# EAGLE board real_with_onsemi (EAGLE 9.3.0)
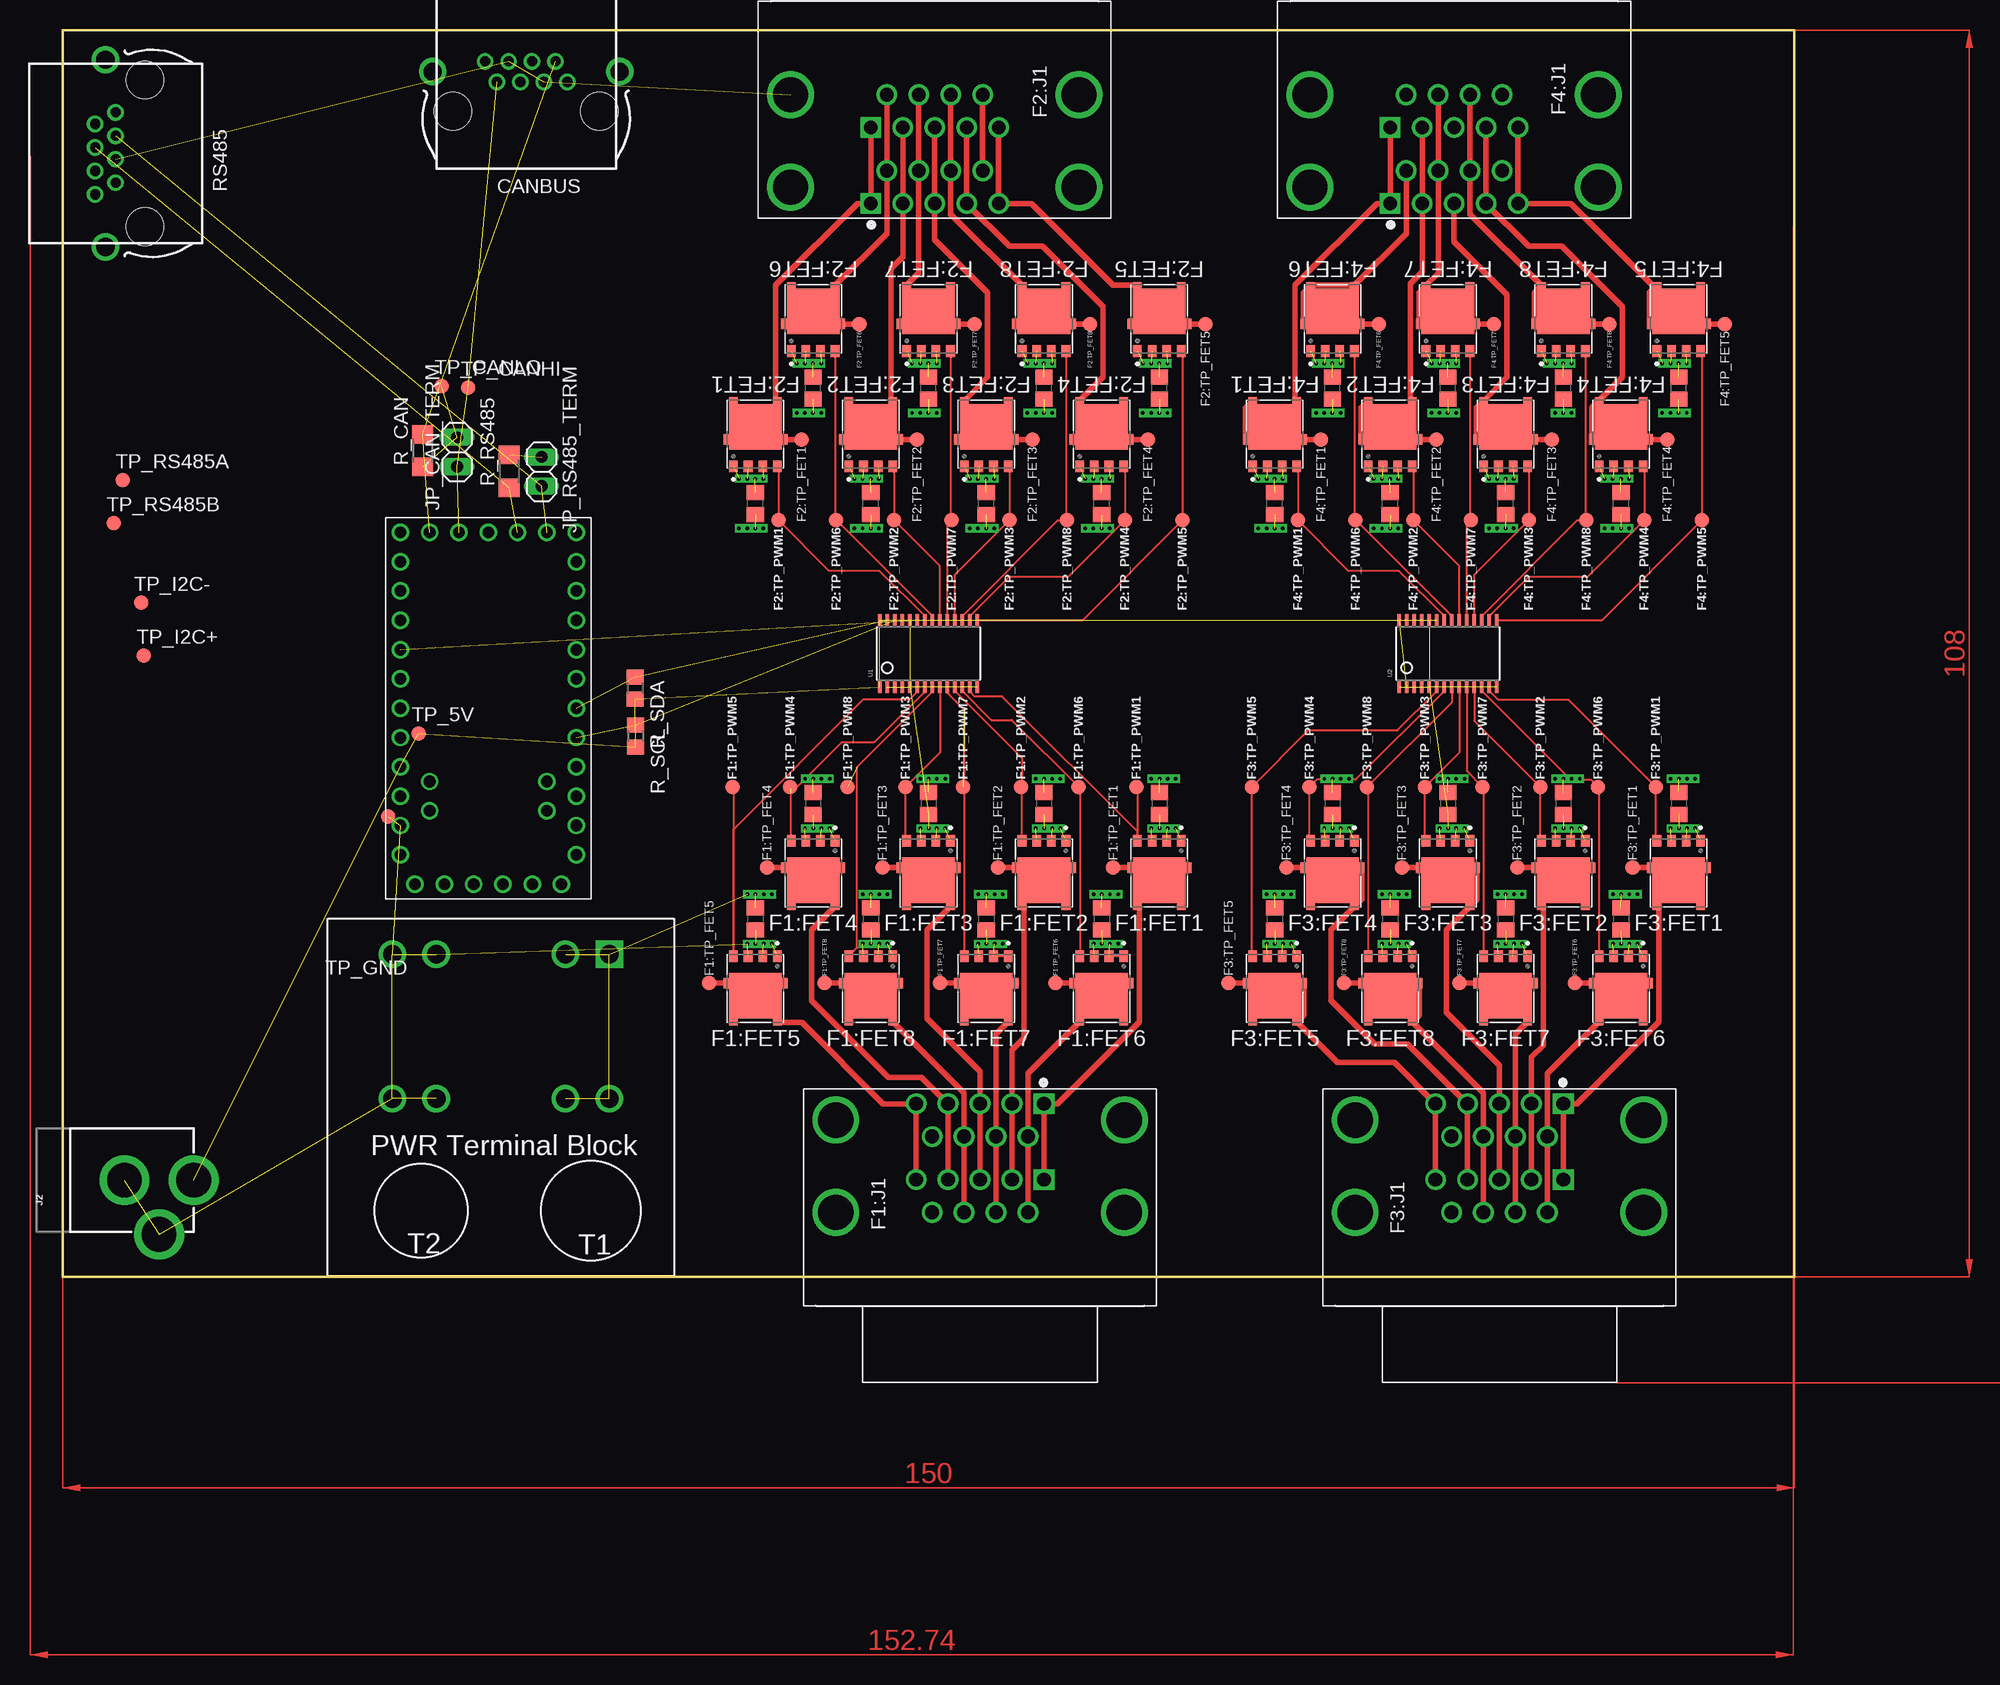
[diagram p0: board, top side]
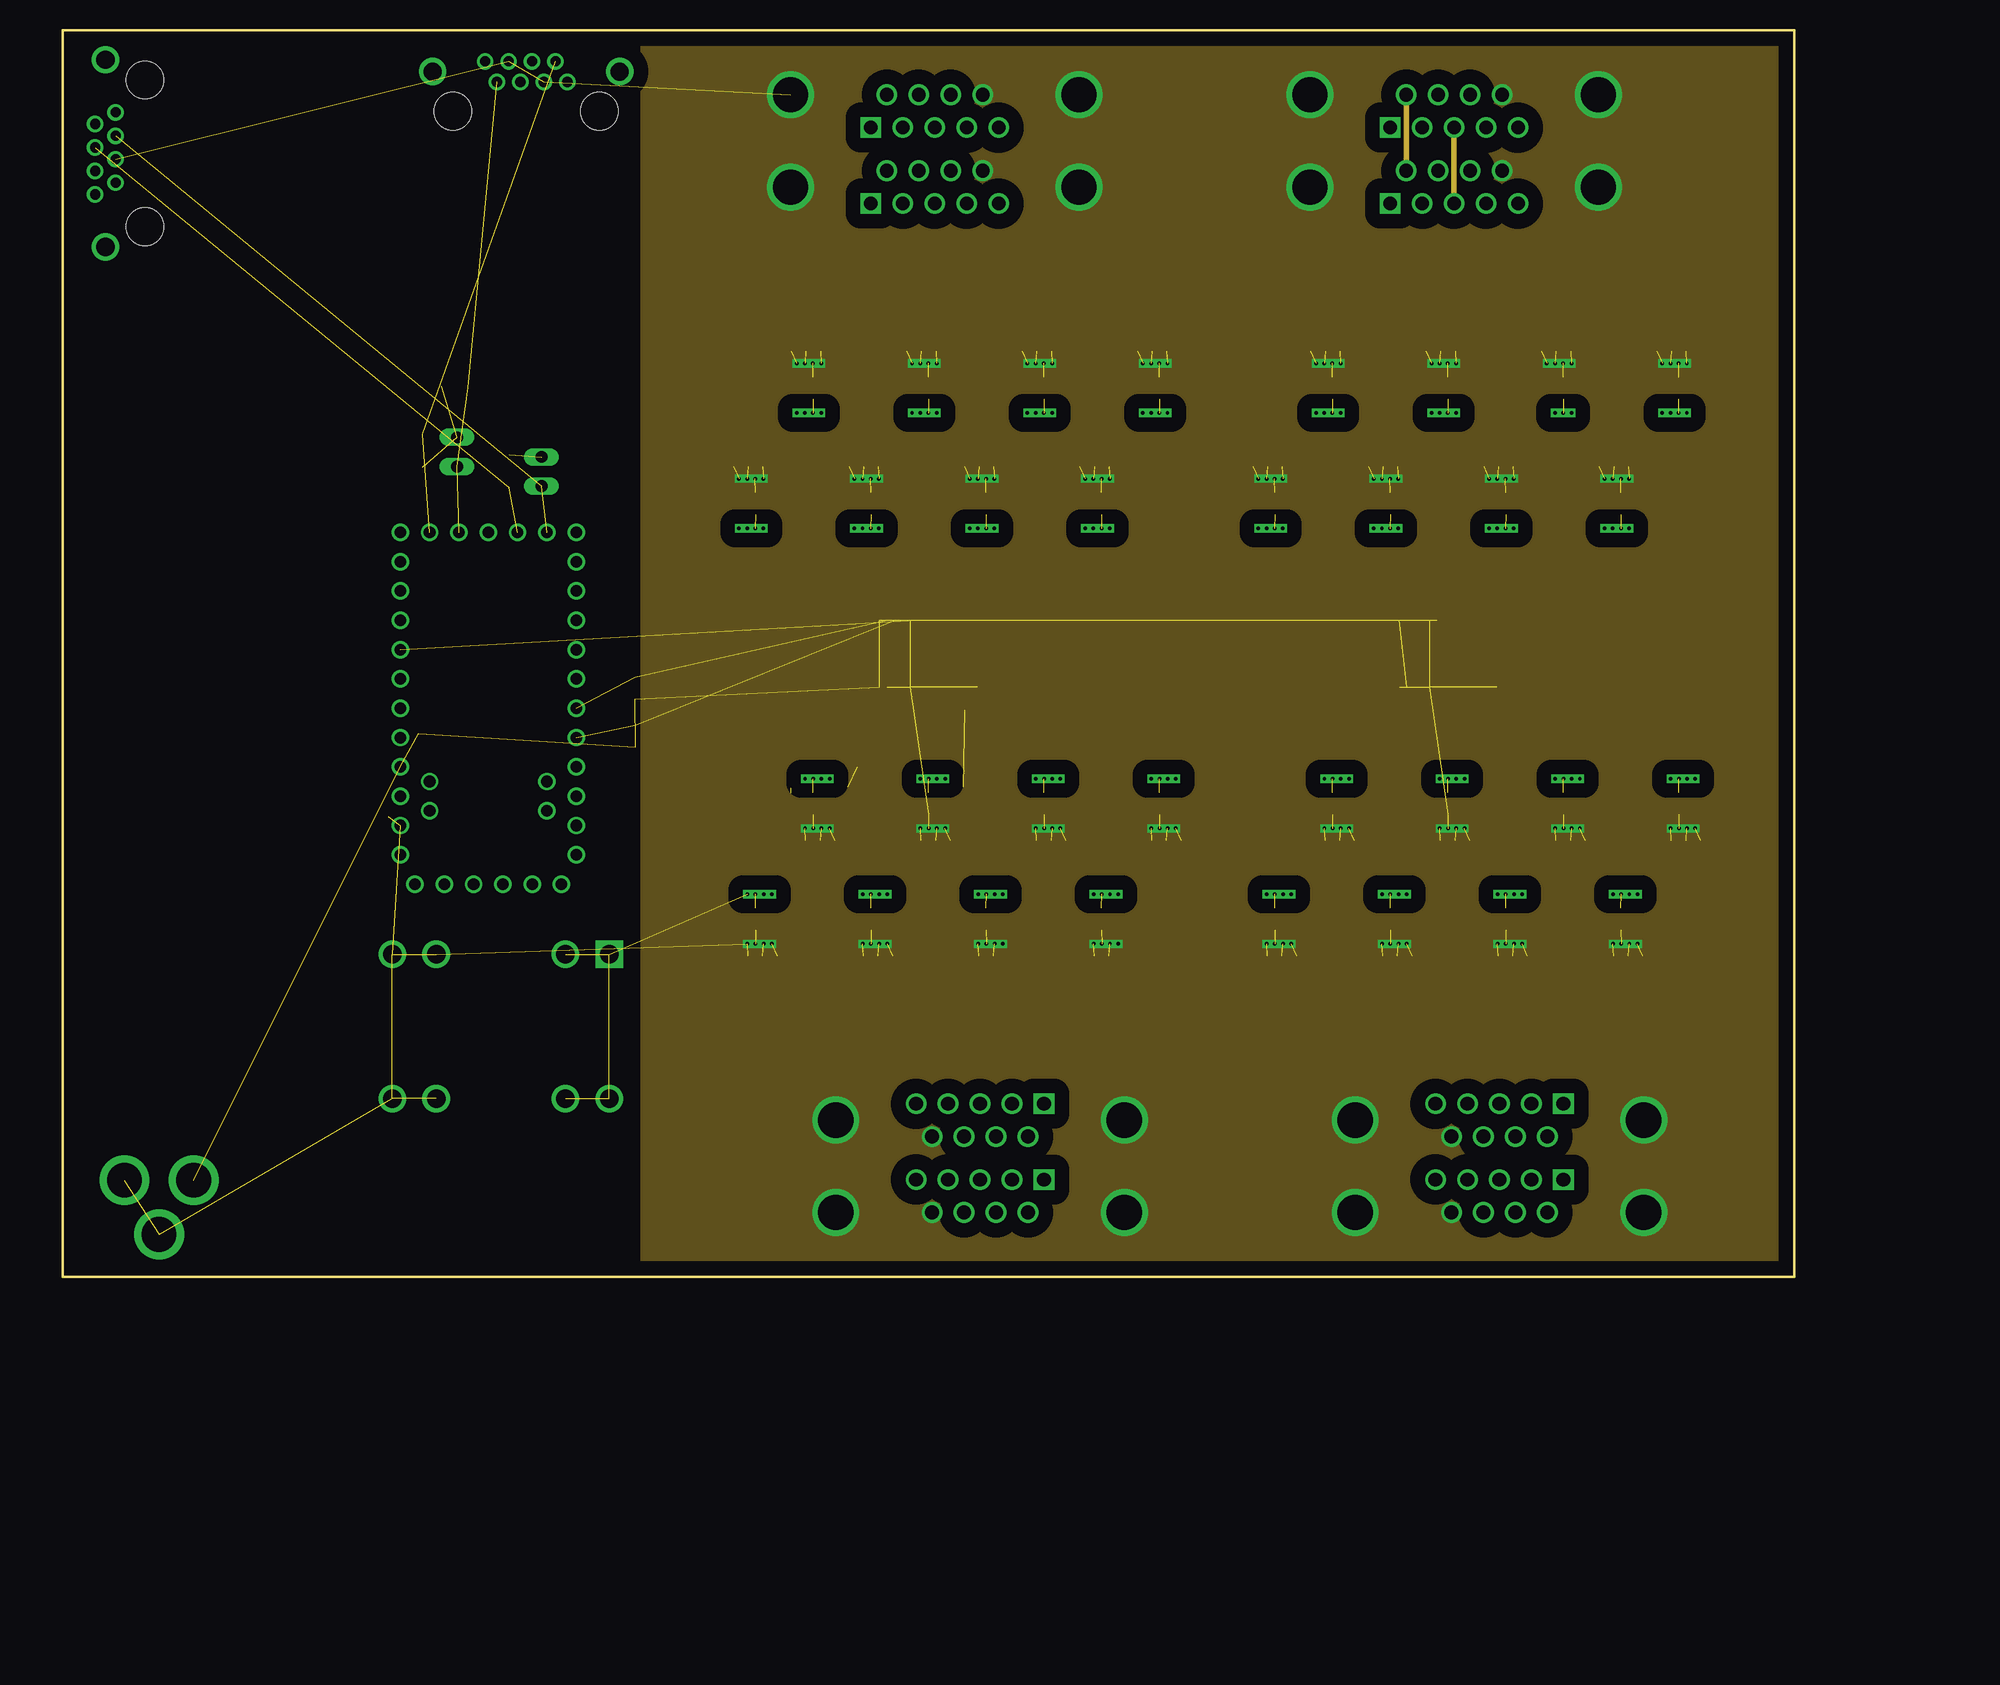
[diagram p1: board, inner layer Route2]
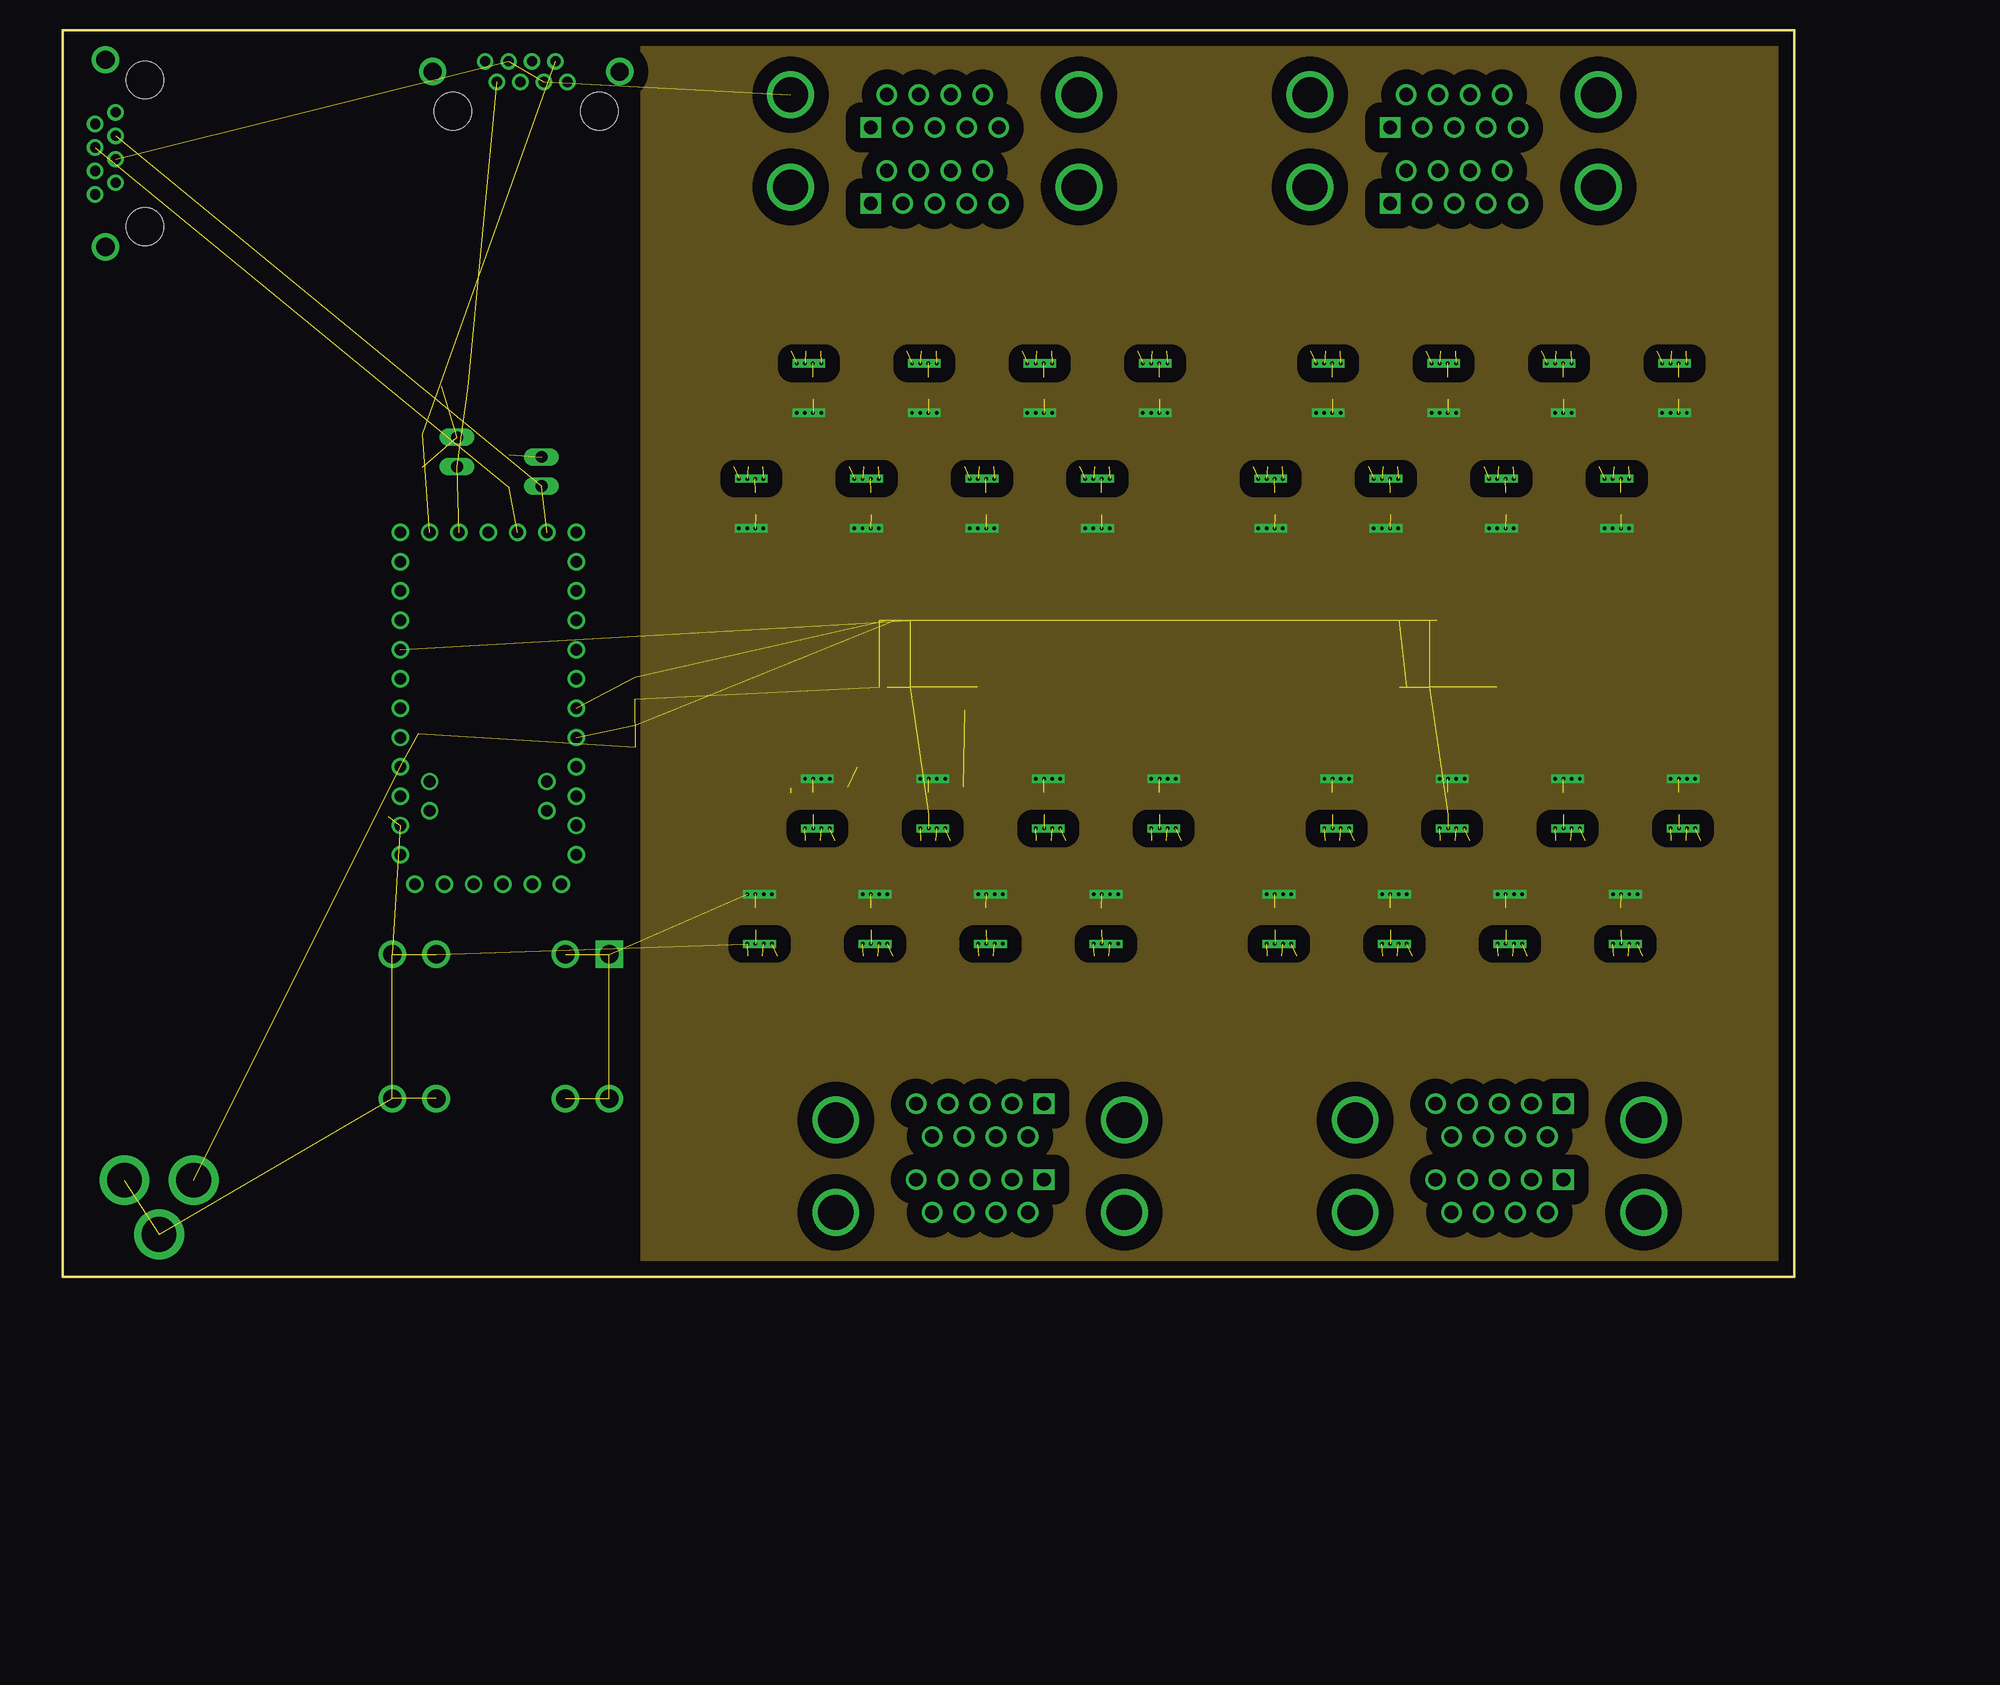
[diagram p2: board, inner layer Route15]

Size 150 x 108 mm. Coordinates in mm from the lower left corner, seen from the top.
Outline: 0,0 150,0 150,108 0,108 0,0
Copper layers (1+2*15+16): Top 0.035mm / dielectric 1.5mm / Route2 0.035mm / dielectric 0.15mm / Route15 0.035mm / dielectric 0.2mm / Bottom 0.035mm
Design rules "default *": minimum track width 6mil, minimum drill 0.35mm, track to track 6mil, track to pad 6mil, pad to pad 6mil, via to via 6mil, smd to smd 6mil, copper to edge 40mil, drill to drill 6mil, minimum pad ring 10mil, minimum via ring 8mil, stop-mask expansion 4mil, vias tented up to drill 0mil, thermal gap 10mil
Net classes: 1 heater: width 0.457 mm, clearance 0.254 mm; 10 heaters: width 0.457 mm, clearance 0.254 mm

## Footprints (pad centres in the part's own frame; a part is rotated, then mirrored left to right if it is on the bottom)
0446200002 = drill 0.889 pad 1.422: 1 3.556,2.54; 2 2.54,4.318; 3 1.524,2.54; 4 0.508,4.318; 5 -0.508,2.54; 6 -1.524,4.318; 7 -2.54,2.54; 8 -3.556,4.318 | drill 1.575 pad 2.286: S@1 -8.103,3.429; S@2 8.103,3.429 | hole 3.251: 6.35,0; -6.35,0
C0805 = smd 1.3 x 1.5: 1 -0.95,0; 2 0.95,0
DFN500X600X110-5N = smd 0.75 x 1: 1 -1.905,-2.795; 2 -0.635,-2.795; 3 0.635,-2.795; 4 1.905,-2.795 | smd 4.56 x 3.955: 5@1 0,0.647 | smd 0.495 x 0.905: 5@2 -2.527,-0.453; 5@3 2.527,-0.453 | smd 0.75 x 0.575: 5@4 1.905,2.913; 5@5 -1.905,2.913
NORCOMP_189-009-513R571 = drill 1.194 square: A1 0,0; B1 0,-6.579 | drill 1.194: A2 -2.769,0; A3 -5.537,0; A4 -8.306,0; A5 -11.074,0; A6 -1.384,-2.845; A7 -4.153,-2.845; A8 -6.921,-2.845; A9 -9.69,-2.845; B2 -2.769,-6.579; B3 -5.537,-6.579; B4 -8.306,-6.579; B5 -11.074,-6.579; B6 -1.384,-9.423; B7 -4.153,-9.423; B8 -6.921,-9.423; B9 -9.69,-9.423 | drill 3.048: SH1 6.96,-1.422; SH2 -18.034,-1.422; SH3 6.96,-9.423; SH4 -18.034,-9.423
B1,27 = smd 1.27 x 1.27: TP 0,0
POWER_JACK_PTH = drill 2.997 pad 4.318: GND 0,7.7; GNDBREAK 4.7,10.7; PWR 0,13.7
TERMINAL_BLOCK_PHOENIX = drill 1.6 square: P$1 9.4,12.4 | drill 1.6: P$2 5.6,12.4; P$3 -5.6,12.4; P$4 -9.4,12.4; P$5 9.4,-0.1; P$6 5.6,-0.1; P$7 -5.6,-0.1; P$8 -9.4,-0.1
1X02 = drill 1.016 long: 1 -1.27,0; 2 1.27,0
R1206 = smd 1.6 x 1.803: 1 -1.422,0; 2 1.422,0
R0805 = smd 1.3 x 1.5: 1 -0.95,0; 2 0.95,0
TSSOP28 = smd 0.305 x 0.991: 1 -4.225,-2.918; 2 -3.575,-2.918; 3 -2.925,-2.918; 4 -2.275,-2.918; 5 -1.625,-2.918; 6 -0.975,-2.918; 7 -0.325,-2.918; 8 0.325,-2.918; 9 0.975,-2.918; 10 1.625,-2.918; 11 2.275,-2.918; 12 2.925,-2.918; 13 3.575,-2.918; 14 4.225,-2.918; 15 4.225,2.918; 16 3.575,2.918; 17 2.925,2.918; 18 2.275,2.918; 19 1.625,2.918; 20 0.975,2.918; 21 0.325,2.918; 22 -0.325,2.918; 23 -0.975,2.918; 24 -1.625,2.918; 25 -2.275,2.918; 26 -2.925,2.918; 27 -3.575,2.918; 28 -4.225,2.918
CAN485 = drill 1: 2 -7.62,2.54; 3 -7.62,0; 4 -7.62,-2.54; 5 -7.62,-5.08; 6 -7.62,-7.62; 7 -7.62,-10.16; 8 -7.62,-12.7; 9 -7.62,-15.24; 10 7.62,-15.24; 11 7.62,-12.7; 12 7.62,-10.16; 13 7.62,-7.62; 485A -2.54,-15.24; 485B -5.08,-15.24; A0 7.62,-5.08; A1 7.62,-2.54; A2 7.62,0; A3 7.62,2.54; A4 5.08,6.35; A5 5.08,8.89; A6 -5.08,6.35; A7 -5.08,8.89; CANHI 2.54,-15.24; CANLO 5.08,-15.24; CTS -3.81,15.24; DTR 6.35,15.24; GND1 -7.62,5.08; GND2 7.62,10.16; GND3 0,-15.24; GND4 -6.35,15.24; RAW 7.62,12.7; RST 7.62,7.62; RST1 -7.62,7.62; RXI 1.27,15.24; RXI1 -7.62,10.16; TXO 3.81,15.24; TXO1 -7.62,12.7; VCC 7.62,5.08; VCC1 -1.27,15.24

## Placement (x,y rotation side)
CANBUS  RJ45-0446200002  [0446200002]  40.14,101 0 top
F1:C1  [C0805]  95,41 270 top
F1:C2  [C0805]  85,41 270 top
F1:C3  [C0805]  75,41 270 top
F1:C4  [C0805]  65,41 270 top
F1:C5  [C0805]  60,31 270 top
F1:C6  [C0805]  90,31 270 top
F1:C7  [C0805]  80,31 270 top
F1:C8  [C0805]  70,31 270 top
F1:FET1  ONSEMI_FET_NVMFS5C604NL  [DFN500X600X110-5N]  95,35 180 top
F1:FET2  ONSEMI_FET_NVMFS5C604NL  [DFN500X600X110-5N]  85,35 180 top
F1:FET3  ONSEMI_FET_NVMFS5C604NL  [DFN500X600X110-5N]  75,35 180 top
F1:FET4  ONSEMI_FET_NVMFS5C604NL  [DFN500X600X110-5N]  65,35 180 top
F1:FET5  ONSEMI_FET_NVMFS5C604NL  [DFN500X600X110-5N]  60,25 180 top
F1:FET6  ONSEMI_FET_NVMFS5C604NL  [DFN500X600X110-5N]  90,25 180 top
F1:FET7  ONSEMI_FET_NVMFS5C604NL  [DFN500X600X110-5N]  80,25 180 top
F1:FET8  ONSEMI_FET_NVMFS5C604NL  [DFN500X600X110-5N]  70,25 180 top
F1:J1  NORCOMP_189-009-513R571  [NORCOMP_189-009-513R571]  85,15 0 top
F1:TP_FET1  TPB1,27  [B1,27]  91,35.45 0 top
F1:TP_FET2  TPB1,27  [B1,27]  81,35.45 0 top
F1:TP_FET3  TPB1,27  [B1,27]  71,35.45 0 top
F1:TP_FET4  TPB1,27  [B1,27]  61,35.45 0 top
F1:TP_FET5  TPB1,27  [B1,27]  56,25.45 0 top
F1:TP_FET6  TPB1,27  [B1,27]  86,25.45 0 top
F1:TP_FET7  TPB1,27  [B1,27]  76,25.45 0 top
F1:TP_FET8  TPB1,27  [B1,27]  66,25.45 0 top
F1:TP_PWM1  TPB1,27  [B1,27]  93,42.45 0 top
F1:TP_PWM2  TPB1,27  [B1,27]  83,42.45 0 top
F1:TP_PWM3  TPB1,27  [B1,27]  73,42.45 0 top
F1:TP_PWM4  TPB1,27  [B1,27]  63,42.45 0 top
F1:TP_PWM5  TPB1,27  [B1,27]  58,42.45 0 top
F1:TP_PWM6  TPB1,27  [B1,27]  88,42.45 0 top
F1:TP_PWM7  TPB1,27  [B1,27]  78,42.45 0 top
F1:TP_PWM8  TPB1,27  [B1,27]  68,42.45 0 top
F2:C1  [C0805]  60,67 90 top
F2:C2  [C0805]  70,67 90 top
F2:C3  [C0805]  80,67 90 top
F2:C4  [C0805]  90,67 90 top
F2:C5  [C0805]  95,77 90 top
F2:C6  [C0805]  65,77 90 top
F2:C7  [C0805]  75,77 90 top
F2:C8  [C0805]  85,77 90 top
F2:FET1  ONSEMI_FET_NVMFS5C604NL  [DFN500X600X110-5N]  60,73 0 top
F2:FET2  ONSEMI_FET_NVMFS5C604NL  [DFN500X600X110-5N]  70,73 0 top
F2:FET3  ONSEMI_FET_NVMFS5C604NL  [DFN500X600X110-5N]  80,73 0 top
F2:FET4  ONSEMI_FET_NVMFS5C604NL  [DFN500X600X110-5N]  90,73 0 top
F2:FET5  ONSEMI_FET_NVMFS5C604NL  [DFN500X600X110-5N]  95,83 0 top
F2:FET6  ONSEMI_FET_NVMFS5C604NL  [DFN500X600X110-5N]  65,83 0 top
F2:FET7  ONSEMI_FET_NVMFS5C604NL  [DFN500X600X110-5N]  75,83 0 top
F2:FET8  ONSEMI_FET_NVMFS5C604NL  [DFN500X600X110-5N]  85,83 0 top
F2:J1  NORCOMP_189-009-513R571  [NORCOMP_189-009-513R571]  70,93 180 top
F2:TP_FET1  TPB1,27  [B1,27]  64,72.55 0 top
F2:TP_FET2  TPB1,27  [B1,27]  74,72.55 0 top
F2:TP_FET3  TPB1,27  [B1,27]  84,72.55 0 top
F2:TP_FET4  TPB1,27  [B1,27]  94,72.55 0 top
F2:TP_FET5  TPB1,27  [B1,27]  99,82.55 0 top
F2:TP_FET6  TPB1,27  [B1,27]  69,82.55 0 top
F2:TP_FET7  TPB1,27  [B1,27]  79,82.55 0 top
F2:TP_FET8  TPB1,27  [B1,27]  89,82.55 0 top
F2:TP_PWM1  TPB1,27  [B1,27]  62,65.55 0 top
F2:TP_PWM2  TPB1,27  [B1,27]  72,65.55 0 top
F2:TP_PWM3  TPB1,27  [B1,27]  82,65.55 0 top
F2:TP_PWM4  TPB1,27  [B1,27]  92,65.55 0 top
F2:TP_PWM5  TPB1,27  [B1,27]  97,65.55 0 top
F2:TP_PWM6  TPB1,27  [B1,27]  67,65.55 0 top
F2:TP_PWM7  TPB1,27  [B1,27]  77,65.55 0 top
F2:TP_PWM8  TPB1,27  [B1,27]  87,65.55 0 top
F3:C1  [C0805]  140,41 270 top
F3:C2  [C0805]  130,41 270 top
F3:C3  [C0805]  120,41 270 top
F3:C4  [C0805]  110,41 270 top
F3:C5  [C0805]  105,31 270 top
F3:C6  [C0805]  135,31 270 top
F3:C7  [C0805]  125,31 270 top
F3:C8  [C0805]  115,31 270 top
F3:FET1  ONSEMI_FET_NVMFS5C604NL  [DFN500X600X110-5N]  140,35 180 top
F3:FET2  ONSEMI_FET_NVMFS5C604NL  [DFN500X600X110-5N]  130,35 180 top
F3:FET3  ONSEMI_FET_NVMFS5C604NL  [DFN500X600X110-5N]  120,35 180 top
F3:FET4  ONSEMI_FET_NVMFS5C604NL  [DFN500X600X110-5N]  110,35 180 top
F3:FET5  ONSEMI_FET_NVMFS5C604NL  [DFN500X600X110-5N]  105,25 180 top
F3:FET6  ONSEMI_FET_NVMFS5C604NL  [DFN500X600X110-5N]  135,25 180 top
F3:FET7  ONSEMI_FET_NVMFS5C604NL  [DFN500X600X110-5N]  125,25 180 top
F3:FET8  ONSEMI_FET_NVMFS5C604NL  [DFN500X600X110-5N]  115,25 180 top
F3:J1  NORCOMP_189-009-513R571  [NORCOMP_189-009-513R571]  130,15 0 top
F3:TP_FET1  TPB1,27  [B1,27]  136,35.45 0 top
F3:TP_FET2  TPB1,27  [B1,27]  126,35.45 0 top
F3:TP_FET3  TPB1,27  [B1,27]  116,35.45 0 top
F3:TP_FET4  TPB1,27  [B1,27]  106,35.45 0 top
F3:TP_FET5  TPB1,27  [B1,27]  101,25.45 0 top
F3:TP_FET6  TPB1,27  [B1,27]  131,25.45 0 top
F3:TP_FET7  TPB1,27  [B1,27]  121,25.45 0 top
F3:TP_FET8  TPB1,27  [B1,27]  111,25.45 0 top
F3:TP_PWM1  TPB1,27  [B1,27]  138,42.45 0 top
F3:TP_PWM2  TPB1,27  [B1,27]  128,42.45 0 top
F3:TP_PWM3  TPB1,27  [B1,27]  118,42.45 0 top
F3:TP_PWM4  TPB1,27  [B1,27]  108,42.45 0 top
F3:TP_PWM5  TPB1,27  [B1,27]  103,42.45 0 top
F3:TP_PWM6  TPB1,27  [B1,27]  133,42.45 0 top
F3:TP_PWM7  TPB1,27  [B1,27]  123,42.45 0 top
F3:TP_PWM8  TPB1,27  [B1,27]  113,42.45 0 top
F4:C1  [C0805]  105,67 90 top
F4:C2  [C0805]  115,67 90 top
F4:C3  [C0805]  125,67 90 top
F4:C4  [C0805]  135,67 90 top
F4:C5  [C0805]  140,77 90 top
F4:C6  [C0805]  110,77 90 top
F4:C7  [C0805]  120,77 90 top
F4:C8  [C0805]  130,77 90 top
F4:FET1  ONSEMI_FET_NVMFS5C604NL  [DFN500X600X110-5N]  105,73 0 top
F4:FET2  ONSEMI_FET_NVMFS5C604NL  [DFN500X600X110-5N]  115,73 0 top
F4:FET3  ONSEMI_FET_NVMFS5C604NL  [DFN500X600X110-5N]  125,73 0 top
F4:FET4  ONSEMI_FET_NVMFS5C604NL  [DFN500X600X110-5N]  135,73 0 top
F4:FET5  ONSEMI_FET_NVMFS5C604NL  [DFN500X600X110-5N]  140,83 0 top
F4:FET6  ONSEMI_FET_NVMFS5C604NL  [DFN500X600X110-5N]  110,83 0 top
F4:FET7  ONSEMI_FET_NVMFS5C604NL  [DFN500X600X110-5N]  120,83 0 top
F4:FET8  ONSEMI_FET_NVMFS5C604NL  [DFN500X600X110-5N]  130,83 0 top
F4:J1  NORCOMP_189-009-513R571  [NORCOMP_189-009-513R571]  115,93 180 top
F4:TP_FET1  TPB1,27  [B1,27]  109,72.55 0 top
F4:TP_FET2  TPB1,27  [B1,27]  119,72.55 0 top
F4:TP_FET3  TPB1,27  [B1,27]  129,72.55 0 top
F4:TP_FET4  TPB1,27  [B1,27]  139,72.55 0 top
F4:TP_FET5  TPB1,27  [B1,27]  144,82.55 0 top
F4:TP_FET6  TPB1,27  [B1,27]  114,82.55 0 top
F4:TP_FET7  TPB1,27  [B1,27]  124,82.55 0 top
F4:TP_FET8  TPB1,27  [B1,27]  134,82.55 0 top
F4:TP_PWM1  TPB1,27  [B1,27]  107,65.55 0 top
F4:TP_PWM2  TPB1,27  [B1,27]  117,65.55 0 top
F4:TP_PWM3  TPB1,27  [B1,27]  127,65.55 0 top
F4:TP_PWM4  TPB1,27  [B1,27]  137,65.55 0 top
F4:TP_PWM5  TPB1,27  [B1,27]  142,65.55 0 top
F4:TP_PWM6  TPB1,27  [B1,27]  112,65.55 0 top
F4:TP_PWM7  TPB1,27  [B1,27]  122,65.55 0 top
F4:TP_PWM8  TPB1,27  [B1,27]  132,65.55 0 top
J2  POWER_JACK  [POWER_JACK_PTH]  -2.37,8.37 270 top
J_48V  PHOENIX_TERMINAL_BLOCK  [TERMINAL_BLOCK_PHOENIX]  37.94,15.54 0 top
JP_CAN_TERM  [1X02]  34.15,71.47 90 top
JP_RS485_TERM  [1X02]  41.47,69.77 90 top
R_CAN  120  [R1206]  31.18,71.59 90 top
R_RS485  120  [R1206]  38.67,69.8 90 top
R_SCL  4.7k  [R0805]  49.62,46.85 270 top
R_SDA  4.7k  [R0805]  49.57,51.01 270 top
RS485  RJ45-0446200002  [0446200002]  7.11,97.34 90 top
TP_5V  TPB1,27  [B1,27]  30.83,47.09 0 top
TP_CANHI  TPB1,27  [B1,27]  35.09,77.04 0 top
TP_CANLO  TPB1,27  [B1,27]  32.82,77.19 0 top
TP_GND  TPB1,27  [B1,27]  28.19,39.9 0 top
TP_I2C+  TPB1,27  [B1,27]  7,53.82 0 top
TP_I2C-  TPB1,27  [B1,27]  6.78,58.4 0 top
TP_RS485A  TPB1,27  [B1,27]  5.18,69.03 0 top
TP_RS485B  TPB1,27  [B1,27]  4.4,65.3 0 top
U1  [TSSOP28]  75,54 0 top
U2  [TSSOP28]  120,54 0 top
U$1  CAN485FULL_SOCKET  [CAN485]  36.85,49.26 180 top

## Library data of the parts
CANBUS RS485 = real_library; MF: MOLEX; MPN: 0446200002; OC_FARNELL: 9251910
F1:C1-F1:C8 F2:C1-F2:C8 F3:C1-F3:C8 F4:C1-F4:C8 = rcl; SPICEPREFIX: C
F1:FET1 = real_library; BGA: (LAYERS (-16 HEATER_A0))
F1:FET2 = real_library; BGA: (LAYERS (-16 HEATER_A1))
F1:FET3 = real_library; BGA: (LAYERS (-16 HEATER_A2))
F1:FET4 = real_library; BGA: (LAYERS (-16 HEATER_A3))
F1:FET5 = real_library; BGA: (LAYERS (-16 HEATER_A4))
F1:FET6 = real_library; BGA: (LAYERS (-16 HEATER_A5))
F1:FET7 = real_library; BGA: (LAYERS (-16 HEATER_A6))
F1:FET8 = real_library; BGA: (LAYERS (-16 HEATER_A7))
F1:J1 F2:J1 F3:J1 F4:J1 = real_library; AVAILABILITY: Unavailable; DESCRIPTION: Conn D-Subminiature F/F 9/9 POS 2.77mm Solder RA Thru-Hole 18 Terminal 2 Port; MF: NorComp Inc.; MP: 189-009-513R571; PACKAGE: None; PRICE: None
F1:TP_FET1-F1:TP_FET8 F1:TP_PWM1-F1:TP_PWM8 F2:TP_FET1-F2:TP_FET8 F2:TP_PWM1-F2:TP_PWM8 F3:TP_FET1-F3:TP_FET8 F3:TP_PWM1-F3:TP_PWM8 F4:TP_FET1-F4:TP_FET8 F4:TP_PWM1-F4:TP_PWM8 TP_5V TP_CANHI TP_CANLO TP_GND TP_I2C+ TP_I2C- TP_RS485A TP_RS485B = testpad
F2:FET1-F2:FET8 F3:FET1-F3:FET8 F4:FET1-F4:FET8 J_48V U1 U2 U$1 = real_library
J2 = real_library; PROD_ID: CONN-08197
JP_CAN_TERM JP_RS485_TERM = pinhead
R_CAN R_RS485 R_SCL R_SDA = rcl; SPICEPREFIX: R

## Nets
ENABLE: U1.23 U2.23 U$1.A0
GND: CANBUS.3 CANBUS.6 F1:C1.2 F1:C2.2 F1:C3.2 F1:C4.2 F1:C5.2 F1:C6.2 F1:C7.2 F1:C8.2 F1:FET1.1 F1:FET1.2 F1:FET1.3 F1:FET2.1 F1:FET2.2 F1:FET2.3 F1:FET3.1 F1:FET3.2 F1:FET3.3 F1:FET4.1 F1:FET4.2 F1:FET4.3 F1:FET5.1 F1:FET5.2 F1:FET5.3 F1:FET6.1 F1:FET6.2 F1:FET6.3 F1:FET7.1 F1:FET7.2 F1:FET7.3 F1:FET8.1 F1:FET8.2 F1:FET8.3 F1:J1.A9 F1:J1.B9 F1:J1.SH1 F1:J1.SH2 F1:J1.SH3 F1:J1.SH4 F2:C1.2 F2:C2.2 F2:C3.2 F2:C4.2 F2:C5.2 F2:C6.2 F2:C7.2 F2:C8.2 F2:FET1.1 F2:FET1.2 F2:FET1.3 F2:FET2.1 F2:FET2.2 F2:FET2.3 F2:FET3.1 F2:FET3.2 F2:FET3.3 F2:FET4.1 F2:FET4.2 F2:FET4.3 F2:FET5.1 F2:FET5.2 F2:FET5.3 F2:FET6.1 F2:FET6.2 F2:FET6.3 F2:FET7.1 F2:FET7.2 F2:FET7.3 F2:FET8.1 F2:FET8.2 F2:FET8.3 F2:J1.A9 F2:J1.B9 F2:J1.SH1 F2:J1.SH2 F2:J1.SH3 F2:J1.SH4 F3:C1.2 F3:C2.2 F3:C3.2 F3:C4.2 F3:C5.2 F3:C6.2 F3:C7.2 F3:C8.2 F3:FET1.1 F3:FET1.2 F3:FET1.3 F3:FET2.1 F3:FET2.2 F3:FET2.3 F3:FET3.1 F3:FET3.2 F3:FET3.3 F3:FET4.1 F3:FET4.2 F3:FET4.3 F3:FET5.1 F3:FET5.2 F3:FET5.3 F3:FET6.1 F3:FET6.2 F3:FET6.3 F3:FET7.1 F3:FET7.2 F3:FET7.3 F3:FET8.1 F3:FET8.2 F3:FET8.3 F3:J1.A9 F3:J1.B9 F3:J1.SH1 F3:J1.SH2 F3:J1.SH3 F3:J1.SH4 F4:C1.2 F4:C2.2 F4:C3.2 F4:C4.2 F4:C5.2 F4:C6.2 F4:C7.2 F4:C8.2 F4:FET1.1 F4:FET1.2 F4:FET1.3 F4:FET2.1 F4:FET2.2 F4:FET2.3 F4:FET3.1 F4:FET3.2 F4:FET3.3 F4:FET4.1 F4:FET4.2 F4:FET4.3 F4:FET5.1 F4:FET5.2 F4:FET5.3 F4:FET6.1 F4:FET6.2 F4:FET6.3 F4:FET7.1 F4:FET7.2 F4:FET7.3 F4:FET8.1 F4:FET8.2 F4:FET8.3 F4:J1.A9 F4:J1.B9 F4:J1.SH1 F4:J1.SH2 F4:J1.SH3 F4:J1.SH4 J2.GND J2.GNDBREAK J_48V.P$3 J_48V.P$4 J_48V.P$7 J_48V.P$8 RS485.5 TP_GND.TP U1.2 U1.3 U1.4 U1.5 U1.14 U1.24 U1.25 U2.1 U2.3 U2.4 U2.5 U2.14 U2.24 U2.25 U$1.GND2
HEATER_A0 [heaters]: F1:FET1.5@1 F1:FET1.5@2 F1:FET1.5@3 F1:FET1.5@4 F1:FET1.5@5 F1:J1.A1 F1:J1.B1 F1:TP_FET1.TP
HEATER_A1 [heaters]: F1:FET2.5@1 F1:FET2.5@2 F1:FET2.5@3 F1:FET2.5@4 F1:FET2.5@5 F1:J1.A2 F1:J1.B2 F1:TP_FET2.TP
HEATER_A2 [heaters]: F1:FET3.5@1 F1:FET3.5@2 F1:FET3.5@3 F1:FET3.5@4 F1:FET3.5@5 F1:J1.A3 F1:J1.B3 F1:TP_FET3.TP
HEATER_A3 [heaters]: F1:FET4.5@1 F1:FET4.5@2 F1:FET4.5@3 F1:FET4.5@4 F1:FET4.5@5 F1:J1.A4 F1:J1.B4 F1:TP_FET4.TP
HEATER_A4 [heaters]: F1:FET5.5@1 F1:FET5.5@2 F1:FET5.5@3 F1:FET5.5@4 F1:FET5.5@5 F1:J1.A5 F1:J1.B5 F1:TP_FET5.TP
HEATER_A5 [heaters]: F1:FET6.5@1 F1:FET6.5@2 F1:FET6.5@3 F1:FET6.5@4 F1:FET6.5@5 F1:J1.A6 F1:J1.B6 F1:TP_FET6.TP
HEATER_A6 [heaters]: F1:FET7.5@1 F1:FET7.5@2 F1:FET7.5@3 F1:FET7.5@4 F1:FET7.5@5 F1:J1.A7 F1:J1.B7 F1:TP_FET7.TP
HEATER_A7 [heaters]: F1:FET8.5@1 F1:FET8.5@2 F1:FET8.5@3 F1:FET8.5@4 F1:FET8.5@5 F1:J1.A8 F1:J1.B8 F1:TP_FET8.TP
HEATER_B0 [heaters]: F2:FET1.5@1 F2:FET1.5@2 F2:FET1.5@3 F2:FET1.5@4 F2:FET1.5@5 F2:J1.A1 F2:J1.B1 F2:TP_FET1.TP
HEATER_B1 [heaters]: F2:FET2.5@1 F2:FET2.5@2 F2:FET2.5@3 F2:FET2.5@4 F2:FET2.5@5 F2:J1.A2 F2:J1.B2 F2:TP_FET2.TP
HEATER_B2 [heaters]: F2:FET3.5@1 F2:FET3.5@2 F2:FET3.5@3 F2:FET3.5@4 F2:FET3.5@5 F2:J1.A3 F2:J1.B3 F2:TP_FET3.TP
HEATER_B3 [heaters]: F2:FET4.5@1 F2:FET4.5@2 F2:FET4.5@3 F2:FET4.5@4 F2:FET4.5@5 F2:J1.A4 F2:J1.B4 F2:TP_FET4.TP
HEATER_B4 [heaters]: F2:FET5.5@1 F2:FET5.5@2 F2:FET5.5@3 F2:FET5.5@4 F2:FET5.5@5 F2:J1.A5 F2:J1.B5 F2:TP_FET5.TP
HEATER_B5 [heaters]: F2:FET6.5@1 F2:FET6.5@2 F2:FET6.5@3 F2:FET6.5@4 F2:FET6.5@5 F2:J1.A6 F2:J1.B6 F2:TP_FET6.TP
HEATER_B6 [heaters]: F2:FET7.5@1 F2:FET7.5@2 F2:FET7.5@3 F2:FET7.5@4 F2:FET7.5@5 F2:J1.A7 F2:J1.B7 F2:TP_FET7.TP
HEATER_B7 [heaters]: F2:FET8.5@1 F2:FET8.5@2 F2:FET8.5@3 F2:FET8.5@4 F2:FET8.5@5 F2:J1.A8 F2:J1.B8 F2:TP_FET8.TP
HEATER_C0 [heaters]: F3:FET1.5@1 F3:FET1.5@2 F3:FET1.5@3 F3:FET1.5@4 F3:FET1.5@5 F3:J1.A1 F3:J1.B1 F3:TP_FET1.TP
HEATER_C1 [heaters]: F3:FET2.5@1 F3:FET2.5@2 F3:FET2.5@3 F3:FET2.5@4 F3:FET2.5@5 F3:J1.A2 F3:J1.B2 F3:TP_FET2.TP
HEATER_C2 [heaters]: F3:FET3.5@1 F3:FET3.5@2 F3:FET3.5@3 F3:FET3.5@4 F3:FET3.5@5 F3:J1.A3 F3:J1.B3 F3:TP_FET3.TP
HEATER_C3 [heaters]: F3:FET4.5@1 F3:FET4.5@2 F3:FET4.5@3 F3:FET4.5@4 F3:FET4.5@5 F3:J1.A4 F3:J1.B4 F3:TP_FET4.TP
HEATER_C4 [heaters]: F3:FET5.5@1 F3:FET5.5@2 F3:FET5.5@3 F3:FET5.5@4 F3:FET5.5@5 F3:J1.A5 F3:J1.B5 F3:TP_FET5.TP
HEATER_C5 [heaters]: F3:FET6.5@1 F3:FET6.5@2 F3:FET6.5@3 F3:FET6.5@4 F3:FET6.5@5 F3:J1.A6 F3:J1.B6 F3:TP_FET6.TP
HEATER_C6 [heaters]: F3:FET7.5@1 F3:FET7.5@2 F3:FET7.5@3 F3:FET7.5@4 F3:FET7.5@5 F3:J1.A7 F3:J1.B7 F3:TP_FET7.TP
HEATER_C7 [heaters]: F3:FET8.5@1 F3:FET8.5@2 F3:FET8.5@3 F3:FET8.5@4 F3:FET8.5@5 F3:J1.A8 F3:J1.B8 F3:TP_FET8.TP
HEATER_D0 [heaters]: F4:FET1.5@1 F4:FET1.5@2 F4:FET1.5@3 F4:FET1.5@4 F4:FET1.5@5 F4:J1.A1 F4:J1.B1 F4:TP_FET1.TP
HEATER_D1 [heaters]: F4:FET2.5@1 F4:FET2.5@2 F4:FET2.5@3 F4:FET2.5@4 F4:FET2.5@5 F4:J1.A2 F4:J1.B2 F4:TP_FET2.TP
HEATER_D2 [heaters]: F4:FET3.5@1 F4:FET3.5@2 F4:FET3.5@3 F4:FET3.5@4 F4:FET3.5@5 F4:J1.A3 F4:J1.B3 F4:TP_FET3.TP
HEATER_D3 [heaters]: F4:FET4.5@1 F4:FET4.5@2 F4:FET4.5@3 F4:FET4.5@4 F4:FET4.5@5 F4:J1.A4 F4:J1.B4 F4:TP_FET4.TP
HEATER_D4 [heaters]: F4:FET5.5@1 F4:FET5.5@2 F4:FET5.5@3 F4:FET5.5@4 F4:FET5.5@5 F4:J1.A5 F4:J1.B5 F4:TP_FET5.TP
HEATER_D5 [heaters]: F4:FET6.5@1 F4:FET6.5@2 F4:FET6.5@3 F4:FET6.5@4 F4:FET6.5@5 F4:J1.A6 F4:J1.B6 F4:TP_FET6.TP
HEATER_D6 [heaters]: F4:FET7.5@1 F4:FET7.5@2 F4:FET7.5@3 F4:FET7.5@4 F4:FET7.5@5 F4:J1.A7 F4:J1.B7 F4:TP_FET7.TP
HEATER_D7 [heaters]: F4:FET8.5@1 F4:FET8.5@2 F4:FET8.5@3 F4:FET8.5@4 F4:FET8.5@5 F4:J1.A8 F4:J1.B8 F4:TP_FET8.TP
N$1: JP_CAN_TERM.2 R_CAN.1 TP_CANLO.TP
N$3: CANBUS.7 JP_CAN_TERM.1 TP_CANHI.TP U$1.CANHI
N$4: CANBUS.2 R_CAN.2 U$1.CANLO
N$5: R_RS485.1 RS485.4 U$1.485A
N$6: JP_RS485_TERM.2 R_RS485.2
N$7: JP_RS485_TERM.1 RS485.3 U$1.485B
N$16: R_SCL.1 U1.26 U2.26 U$1.2
N$19: R_SDA.1 U1.27 U2.27 U$1.3
PWM_A0: F1:FET5.4 F1:TP_PWM5.TP U1.6
PWM_A1: F1:FET4.4 F1:TP_PWM4.TP U1.7
PWM_A2: F1:FET8.4 F1:TP_PWM8.TP U1.8
PWM_A3: F1:FET3.4 F1:TP_PWM3.TP U1.9
PWM_A4: F1:FET7.4 F1:TP_PWM7.TP U1.10
PWM_A5: F1:FET2.4 F1:TP_PWM2.TP U1.11
PWM_A6: F1:FET6.4 F1:TP_PWM6.TP U1.12
PWM_A7: F1:FET1.4 F1:TP_PWM1.TP U1.13
PWM_B0: F2:FET5.4 F2:TP_PWM5.TP U1.15
PWM_B1: F2:FET4.4 F2:TP_PWM4.TP U1.16
PWM_B2: F2:FET8.4 F2:TP_PWM8.TP U1.17
PWM_B3: F2:FET3.4 F2:TP_PWM3.TP U1.18
PWM_B4: F2:FET7.4 F2:TP_PWM7.TP U1.19
PWM_B5: F2:FET2.4 F2:TP_PWM2.TP U1.20
PWM_B6: F2:FET6.4 F2:TP_PWM6.TP U1.21
PWM_B7: F2:FET1.4 F2:TP_PWM1.TP U1.22
PWM_C0: F3:FET5.4 F3:TP_PWM5.TP U2.6
PWM_C1: F3:FET4.4 F3:TP_PWM4.TP U2.7
PWM_C2: F3:FET8.4 F3:TP_PWM8.TP U2.8
PWM_C3: F3:FET3.4 F3:TP_PWM3.TP U2.9
PWM_C4: F3:FET7.4 F3:TP_PWM7.TP U2.10
PWM_C5: F3:FET2.4 F3:TP_PWM2.TP U2.11
PWM_C6: F3:FET6.4 F3:TP_PWM6.TP U2.12
PWM_C7: F3:FET1.4 F3:TP_PWM1.TP U2.13
PWM_D0: F4:FET5.4 F4:TP_PWM5.TP U2.15
PWM_D1: F4:FET4.4 F4:TP_PWM4.TP U2.16
PWM_D2: F4:FET8.4 F4:TP_PWM8.TP U2.17
PWM_D3: F4:FET3.4 F4:TP_PWM3.TP U2.18
PWM_D4: F4:FET7.4 F4:TP_PWM7.TP U2.19
PWM_D5: F4:FET2.4 F4:TP_PWM2.TP U2.20
PWM_D6: F4:FET6.4 F4:TP_PWM6.TP U2.21
PWM_D7: F4:FET1.4 F4:TP_PWM1.TP U2.22
V_48V: F1:C1.1 F1:C2.1 F1:C3.1 F1:C4.1 F1:C5.1 F1:C6.1 F1:C7.1 F1:C8.1 F2:C1.1 F2:C2.1 F2:C3.1 F2:C4.1 F2:C5.1 F2:C6.1 F2:C7.1 F2:C8.1 F3:C1.1 F3:C2.1 F3:C3.1 F3:C4.1 F3:C5.1 F3:C6.1 F3:C7.1 F3:C8.1 F4:C1.1 F4:C2.1 F4:C3.1 F4:C4.1 F4:C5.1 F4:C6.1 F4:C7.1 F4:C8.1 J_48V.P$1 J_48V.P$2 J_48V.P$5 J_48V.P$6
VCC: J2.PWR R_SCL.2 R_SDA.2 TP_5V.TP U1.1 U1.28 U2.2 U2.28 U$1.VCC

## Tracks (layer width: path | path; a pad name or v marks a point on that pad's centre or on a via)
ENABLE  (2 unrouted)
GND  (via drill 0.3)  (151 unrouted)
  Top 0.152: F1:FET7.2 F1:FET7.1 | F1:FET6.2 F1:FET6.1
  Top 0.457: F2:J1.B9 F2:J1.A9
  other vias: 94.3,38.85 95.01,38.85 95.72,38.85 96.43,38.85 84.3,38.85 85.01,38.85 85.72,38.85 86.43,38.85 74.3,38.85 75.01,38.85 75.72,38.85 76.43,38.85 64.3,38.85 65.01,38.85 65.72,38.85 66.43,38.85 59.3,28.85 60.01,28.85 60.72,28.85 61.43,28.85 89.3,28.85 90.01,28.85 90.72,28.85 91.43,28.85 79.3,28.85 80.01,28.85 80.72,28.85 81.43,28.85 69.3,28.85 70.01,28.85 70.72,28.85 71.43,28.85 60.7,69.15 59.99,69.15 59.28,69.15 58.57,69.15 70.7,69.15 69.99,69.15 69.28,69.15 68.57,69.15 80.7,69.15 79.99,69.15 79.28,69.15 78.57,69.15 90.7,69.15 89.99,69.15 89.28,69.15 88.57,69.15 95.7,79.15 94.99,79.15 94.28,79.15 93.57,79.15 65.7,79.15 64.99,79.15 64.28,79.15 63.57,79.15 75.7,79.15 74.99,79.15 74.28,79.15 73.57,79.15 85.7,79.15 84.99,79.15 84.28,79.15 83.57,79.15 139.3,38.85 140.01,38.85 140.72,38.85 141.43,38.85 129.3,38.85 130.01,38.85 130.72,38.85 131.43,38.85 119.3,38.85 120.01,38.85 120.72,38.85 121.43,38.85 109.3,38.85 110.01,38.85 110.72,38.85 111.43,38.85 104.3,28.85 105.01,28.85 105.72,28.85 106.43,28.85 134.3,28.85 135.01,28.85 135.72,28.85 136.43,28.85 124.3,28.85 125.01,28.85 125.72,28.85 126.43,28.85 114.3,28.85 115.01,28.85 115.72,28.85 116.43,28.85 105.7,69.15 104.99,69.15 104.28,69.15 103.57,69.15 115.7,69.15 114.99,69.15 114.28,69.15 113.57,69.15 125.7,69.15 124.99,69.15 124.28,69.15 123.57,69.15 135.7,69.15 134.99,69.15 134.28,69.15 133.57,69.15 140.7,79.15 139.99,79.15 139.28,79.15 138.57,79.15 110.7,79.15 109.99,79.15 109.28,79.15 108.57,79.15 120.7,79.15 119.99,79.15 119.28,79.15 118.57,79.15 130.7,79.15 129.99,79.15 129.28,79.15 128.57,79.15
  pour Route2 (isolate 1.27, no thermals): 50.1,107.9 149.9,107.9 149.9,0.1 50.35,0.1 arc-90 50.1,0.35
HEATER_A0
  Top 0.457: F1:FET1.5@3 F1:TP_FET1.TP | F1:J1.B1 F1:J1.A1 86.16,15 93.26,22.09 93.26,31.93 F1:FET1.5@4
HEATER_A1
  Top 0.457: F1:J1.B2 F1:J1.A2 82.23,19.68 83.26,20.7 83.26,31.93 F1:FET2.5@4 | F1:FET2.5@3 F1:TP_FET2.TP
HEATER_A2
  Top 0.457: F1:J1.B3 F1:J1.A3 79.46,17.79 74.88,22.37 74.88,30.07 F1:FET3.5@5 | F1:TP_FET3.TP F1:FET3.5@3
HEATER_A3
  Top 0.457: F1:J1.B4 F1:J1.A4 74.41,17.29 71.55,17.29 64.88,23.95 64.88,30.07 F1:FET4.5@5 | F1:TP_FET4.TP F1:FET4.5@3
HEATER_A4
  Top 0.457: F1:FET5.5@3 | F1:FET5.5@5 61.91,22.02 64.05,22.02 71.07,15 F1:J1.A5 F1:J1.B5 | F1:TP_FET5.TP F1:FET5.5@3
HEATER_A5
  Top 0.457: F1:FET6.5@3 F1:TP_FET6.TP | F1:J1.B6 F1:J1.A6 83.62,17.61 F1:FET6.5@4
HEATER_A6
  Top 0.457: F1:J1.B7 F1:J1.A7 80.85,21.03 F1:FET7.5@5 | F1:FET7.5@3 F1:TP_FET7.TP
HEATER_A7
  Top 0.457: F1:FET8.5@5 71.96,22.03 78.08,15.91 F1:J1.A8 F1:J1.B8 | 67.7,25.22 F1:FET8.5@3 F1:TP_FET8.TP
HEATER_B0
  Top 0.457: F2:J1.B1 F2:J1.A1 68.84,93 61.74,85.91 61.74,76.08 F2:FET1.5@4 | F2:TP_FET1.TP F2:FET1.5@3
HEATER_B1
  Top 0.457: F2:J1.B2 F2:J1.A2 72.77,88.39 71.74,87.37 71.74,76.08 F2:FET2.5@4 | F2:FET2.5@3 F2:TP_FET2.TP
HEATER_B2
  Top 0.457: F2:J1.B3 F2:J1.A3 75.54,89.86 80.12,85.28 80.12,77.94 F2:FET3.5@5 | F2:TP_FET3.TP F2:FET3.5@3
HEATER_B3
  Top 0.457: F2:J1.B4 F2:J1.A4 82.01,89.3 84.86,89.3 90.12,84.05 90.12,77.94 F2:FET4.5@5 | F2:TP_FET4.TP F2:FET4.5@3
HEATER_B4
  Top 0.457: F2:J1.B5 F2:J1.A5 83.91,93 91,85.91 F2:FET5.5@5 | F2:TP_FET5.TP F2:FET5.5@3
HEATER_B5
  Top 0.457: F2:J1.B6 F2:J1.A6 71.38,90.39 F2:FET6.5@4 | F2:FET6.5@3 F2:TP_FET6.TP
HEATER_B6
  Top 0.457: F2:J1.B7 F2:J1.A7 74.15,86.97 F2:FET7.5@5 | F2:FET7.5@3 F2:TP_FET7.TP
HEATER_B7
  Top 0.457: F2:J1.B8 F2:J1.A8 76.92,92.09 F2:FET8.5@5 | F2:TP_FET8.TP F2:FET8.5@3
HEATER_C0
  Top 0.457: F3:J1.B1 F3:J1.A1 131.16,15 138.26,22.09 138.26,31.93 F3:FET1.5@4 | F3:TP_FET1.TP F3:FET1.5@3
HEATER_C1
  Top 0.457: F3:J1.B2 F3:J1.A2 127.23,19.03 128.26,20.06 128.26,31.93 F3:FET2.5@4 | F3:TP_FET2.TP F3:FET2.5@3
HEATER_C2
  Top 0.457: F3:FET3.5@1 121.1,35.45 F3:FET3.5@2 122.53,32.71 F3:FET3.5@5 119.88,30.07 119.88,22.89 124.46,18.31 F3:J1.A3 F3:J1.B3 | F3:FET3.5@4 118.09,32.45 F3:FET3.5@1 | F3:FET3.5@1 118.9,35.45 F3:FET3.5@3 F3:TP_FET3.TP
HEATER_C3
  Top 0.457: F3:FET4.5@1 111.1,35.45 F3:FET4.5@2 112.53,32.71 F3:FET4.5@5 109.88,30.07 109.88,23.95 113.65,20.19 116.51,20.19 F3:J1.A4 F3:J1.B4 | F3:FET4.5@4 108.09,32.45 F3:FET4.5@1 | F3:FET4.5@1 108.9,35.45 F3:FET4.5@3 F3:TP_FET4.TP
HEATER_C4
  Top 0.457: F3:FET5.5@1 106.1,25.45 F3:FET5.5@2 107.53,22.71 F3:FET5.5@5 110.42,18.57 115.35,18.57 F3:J1.A5 F3:J1.B5 | F3:FET5.5@4 103.09,22.45 F3:FET5.5@1 | F3:FET5.5@1 103.9,25.45 F3:FET5.5@3 F3:TP_FET5.TP
HEATER_C5
  Top 0.457: F3:J1.B6 F3:J1.A6 128.62,17.61 F3:FET6.5@4 | F3:TP_FET6.TP F3:FET6.5@3
HEATER_C6
  Top 0.457: F3:J1.B7 F3:J1.A7 125.85,21.03 F3:FET7.5@5 | F3:TP_FET7.TP F3:FET7.5@3
HEATER_C7
  Top 0.457: F3:FET8.5@1 116.1,25.45 F3:FET8.5@2 117.53,22.71 F3:FET8.5@5 123.08,15.91 F3:J1.A8 F3:J1.B8 | F3:FET8.5@4 113.09,22.45 F3:FET8.5@1 | F3:FET8.5@1 113.9,25.45 F3:FET8.5@3 F3:TP_FET8.TP
HEATER_D0
  Top 0.457: F4:FET1.5@1 103.9,72.55 F4:FET1.5@2 102.47,75.29 F4:FET1.5@5 | F4:FET1.5@1 106.91,75.55 F4:FET1.5@4 106.74,76.08 106.74,85.91 113.84,93 F4:J1.A1 F4:J1.B1 | F4:FET1.5@1 106.1,72.55 F4:FET1.5@3 F4:TP_FET1.TP
HEATER_D1
  Top 0.457: F4:FET2.5@1 113.9,72.55 F4:FET2.5@2 112.47,75.29 F4:FET2.5@5 | F4:FET2.5@1 116.91,75.55 F4:FET2.5@4 116.74,76.08 116.74,86.07 117.77,87.1 F4:J1.A2 F4:J1.B2 | F4:FET2.5@1 116.1,72.55 F4:FET2.5@3 F4:TP_FET2.TP
HEATER_D2
  Top 0.457: F4:FET3.5@1 123.9,72.55 F4:FET3.5@2 122.47,75.29 F4:FET3.5@5 125.12,77.94 125.12,85.11 120.54,89.69 F4:J1.A3 | F4:FET3.5@4 126.91,75.55 F4:FET3.5@1 | F4:FET3.5@1 126.1,72.55 F4:FET3.5@3 F4:TP_FET3.TP
  Route2 0.457: F4:J1.A3 F4:J1.B3
HEATER_D3
  Top 0.457: F4:FET4.5@1 133.9,72.55 F4:FET4.5@2 132.47,75.29 F4:FET4.5@5 135.12,77.94 135.12,84.05 129.86,89.3 127.01,89.3 F4:J1.A4 F4:J1.B4 | F4:FET4.5@4 136.91,75.55 F4:FET4.5@1 | F4:FET4.5@1 136.1,72.55 F4:FET4.5@3 F4:TP_FET4.TP
HEATER_D4
  Top 0.457: F4:FET5.5@1 138.9,82.55 F4:FET5.5@2 137.47,85.29 F4:FET5.5@5 137.72,85.91 130.63,93 F4:J1.A5 F4:J1.B5 | F4:FET5.5@4 141.91,85.55 F4:FET5.5@1 | F4:FET5.5@1 141.1,82.55 F4:FET5.5@3 F4:TP_FET5.TP
HEATER_D5
  Top 0.457: F4:TP_FET6.TP F4:FET6.5@3 111.1,82.55 F4:FET6.5@1 108.9,82.55 F4:FET6.5@2 107.47,85.29 F4:FET6.5@5 F4:FET6.5@4 116.38,90.39 F4:J1.A6
  Route2 0.457: F4:J1.B6 F4:J1.A6
HEATER_D6
  Top 0.457: F4:FET7.5@1 118.9,82.55 F4:FET7.5@2 117.47,85.29 F4:FET7.5@5 119.15,86.97 F4:J1.A7 F4:J1.B7 | F4:FET7.5@4 121.91,85.55 F4:FET7.5@1 | F4:FET7.5@1 121.1,82.55 F4:FET7.5@3 F4:TP_FET7.TP
HEATER_D7
  Top 0.457: F4:FET8.5@1 128.9,82.55 F4:FET8.5@2 127.47,85.29 F4:FET8.5@5 121.92,92.09 F4:J1.A8 F4:J1.B8 | F4:FET8.5@4 131.91,85.55 F4:FET8.5@1 | F4:FET8.5@1 131.1,82.55 F4:FET8.5@3 F4:TP_FET8.TP
N$1  (2 unrouted)
N$3  (3 unrouted)
N$4  (2 unrouted)
N$5  (2 unrouted)
N$6  (1 unrouted)
N$7  (2 unrouted)
N$16  (3 unrouted)
N$19  (3 unrouted)
PWM_A0
  Top 0.152: 74.03,50.69 73.38,50.04 69.37,50.04 58.09,38.77 F1:FET5.4 58.09,42.35
  Top 0.254: 58.09,42.35 F1:TP_PWM5.TP | U1.6 74.03,50.69
PWM_A1  (1 unrouted)
  Top 0.152: F1:FET4.4 63.09,41.91 67.5,46.32 70.31,46.32 74.67,50.69
  Top 0.254: 63.09,42.35 F1:TP_PWM4.TP | U1.7 74.67,50.69
PWM_A2  (1 unrouted)
  Top 0.152: F1:FET8.4 68.82,28.52 68.82,44.19 75.33,50.69
  Top 0.254: 68.16,42.29 F1:TP_PWM8.TP | U1.8 75.33,50.69
PWM_A3
  Top 0.152: U1.9 75.97,45.42 F1:TP_PWM3.TP 73,37.89
  Top 0.254: F1:FET3.4 73,37.89
PWM_A4  (1 unrouted)
  Top 0.152: F1:FET7.4 78.11,27.8 78.11,49.11 76.64,50.57 76.64,51.07
  Top 0.254: 76.64,51.07 U1.10 | 78.16,42.29 F1:TP_PWM7.TP
PWM_A5
  Top 0.152: F1:FET2.4 83.09,42.35 83.09,44.94 77.28,50.76 U1.11
  Top 0.254: 83.09,42.35 F1:TP_PWM2.TP
PWM_A6
  Top 0.152: F1:FET6.4 88.16,27.86 88.16,42.29 82.19,48.26 80.43,48.26 77.92,50.76 U1.12
  Top 0.254: 88.16,42.29 F1:TP_PWM6.TP
PWM_A7
  Top 0.152: 78.58,50.69 78.97,50.29 81.38,50.29 93.09,38.58 F1:FET1.4 93.09,42.35
  Top 0.254: U1.13 78.58,50.69
  Top 0.457: 93.09,42.35 F1:TP_PWM1.TP
PWM_B0
  Top 0.152: U1.15 88.37,56.92 F2:TP_PWM5.TP 97,80.11 F2:FET5.4
PWM_B1
  Top 0.152: U1.16 78.58,57.24 82,60.67 87.12,60.67 F2:TP_PWM4.TP 92,70.11 F2:FET4.4
PWM_B2
  Top 0.152: F2:FET8.4 86.9,80.19 86.9,65.66 F2:TP_PWM8.TP 86.24,65.55 77.92,57.24 U1.17
PWM_B3
  Top 0.152: F2:FET3.4 82,70.11 F2:TP_PWM3.TP 77.28,60.83 U1.18
PWM_B4
  Top 0.152: F2:FET7.4 76.89,80.19 76.89,65.66 F2:TP_PWM7.TP 76.62,65.17 U1.19
PWM_B5
  Top 0.152: F2:FET2.4 72,70.11 F2:TP_PWM2.TP 75.97,61.58 U1.20
PWM_B6
  Top 0.152: U1.21 75.33,57.24 67.01,65.55 F2:TP_PWM6.TP 66.89,65.66 66.89,80.19 F2:FET6.4
PWM_B7
  Top 0.152: F2:FET1.4 62,70.11 F2:TP_PWM1.TP 66.39,61.16 70.75,61.16 74.67,57.24 U1.22
PWM_C0
  Top 0.152: U2.6 119.03,50.76 115.59,47.33 107.88,47.33 F3:TP_PWM5.TP 103,27.89 F3:FET5.4
PWM_C1
  Top 0.152: U2.7 119.67,50.76 112,43.09 108.63,43.09 F3:TP_PWM4.TP 108,37.89 F3:FET4.4
PWM_C2
  Top 0.152: U2.8 120.33,49.77 F3:TP_PWM8.TP 113.1,42.34 113.1,27.8 F3:FET8.4
PWM_C3
  Top 0.152: F3:FET3.4 118,37.89 F3:TP_PWM3.TP 120.97,45.42 U2.9
PWM_C4
  Top 0.152: F3:FET7.4 123.11,27.8 123.11,42.34 F3:TP_PWM7.TP 121.62,43.83 U2.10
PWM_C5
  Top 0.152: F3:FET2.4 128,37.89 F3:TP_PWM2.TP 122.28,48.17 U2.11
PWM_C6
  Top 0.152: F3:FET6.4 133.11,27.8 133.11,42.34 F3:TP_PWM6.TP 132.37,43.09 130.6,43.09 122.92,50.76 U2.12
PWM_C7
  Top 0.152: U2.13 123.58,50.76 124.33,50 130.45,50 F3:TP_PWM1.TP 138,37.89 F3:FET1.4
PWM_D0
  Top 0.152: U2.15 133.37,56.92 F4:TP_PWM5.TP 142,80.11 F4:FET5.4
PWM_D1
  Top 0.152: U2.16 123.58,57.24 127,60.67 132.12,60.67 F4:TP_PWM4.TP 137,70.11 F4:FET4.4
PWM_D2
  Top 0.152: U2.17 122.92,57.24 131.24,65.55 F4:TP_PWM8.TP 131.89,65.66 131.89,80.19 F4:FET8.4
PWM_D3
  Top 0.152: F4:FET3.4 127,70.11 F4:TP_PWM3.TP 122.28,60.83 U2.18
PWM_D4
  Top 0.152: U2.19 121.62,65.17 F4:TP_PWM7.TP 121.89,65.66 121.89,80.19 F4:FET7.4
PWM_D5
  Top 0.152: F4:FET2.4 117,70.11 F4:TP_PWM2.TP 120.97,61.58 U2.20
PWM_D6
  Top 0.152: F4:FET6.4 111.9,80.19 111.9,65.66 F4:TP_PWM6.TP 112.01,65.55 120.33,57.24 U2.21
PWM_D7
  Top 0.152: U2.22 119.67,57.24 115.75,61.16 111.39,61.16 F4:TP_PWM1.TP 107,70.11 F4:FET1.4
V_48V  (via drill 0.3)  (36 unrouted)
  other vias: 94.3,43.15 95.01,43.15 95.72,43.15 96.43,43.15 84.3,43.15 85.01,43.15 85.72,43.15 86.43,43.15 74.3,43.15 75.01,43.15 75.72,43.15 76.43,43.15 64.3,43.15 65.01,43.15 65.72,43.15 66.43,43.15 59.3,33.15 60.01,33.15 60.72,33.15 61.43,33.15 89.3,33.15 90.01,33.15 90.72,33.15 91.43,33.15 79.3,33.15 80.01,33.15 80.72,33.15 81.43,33.15 69.3,33.15 70.01,33.15 70.72,33.15 71.43,33.15 60.7,64.85 59.99,64.85 59.28,64.85 58.57,64.85 70.7,64.85 69.99,64.85 69.28,64.85 68.57,64.85 80.7,64.85 79.99,64.85 79.28,64.85 78.57,64.85 90.7,64.85 89.99,64.85 89.28,64.85 88.57,64.85 95.7,74.85 94.99,74.85 94.28,74.85 93.57,74.85 65.7,74.85 64.99,74.85 64.28,74.85 63.57,74.85 75.7,74.85 74.99,74.85 74.28,74.85 73.57,74.85 85.7,74.85 84.99,74.85 84.28,74.85 83.57,74.85 139.3,43.15 140.01,43.15 140.72,43.15 141.43,43.15 129.3,43.15 130.01,43.15 130.72,43.15 131.43,43.15 119.3,43.15 120.01,43.15 120.72,43.15 121.43,43.15 109.3,43.15 110.01,43.15 110.72,43.15 111.43,43.15 104.3,33.15 105.01,33.15 105.72,33.15 106.43,33.15 134.3,33.15 135.01,33.15 135.72,33.15 136.43,33.15 124.3,33.15 125.01,33.15 125.72,33.15 126.43,33.15 114.3,33.15 115.01,33.15 115.72,33.15 116.43,33.15 105.7,64.85 104.99,64.85 104.28,64.85 103.57,64.85 115.7,64.85 114.99,64.85 114.28,64.85 113.57,64.85 125.7,64.85 124.99,64.85 124.28,64.85 123.57,64.85 135.7,64.85 134.99,64.85 134.28,64.85 133.57,64.85 140.7,74.85 139.99,74.85 139.28,74.85 138.57,74.85 110.7,74.85 109.99,74.85 109.28,74.85 108.57,74.85 120.7,74.85 119.99,74.85 119.28,74.85 118.57,74.85 130.7,74.85 129.99,74.85 129.28,74.85
  pour Route15 (isolate 1.27, no thermals): 50.1,107.9 149.9,107.9 149.86,0.13 50.1,0.13
VCC  (8 unrouted)
(copper drawn outside any net)
  shapes: Top area x4